# Altium PCB Shield_MCXC444 - PCB.PcbDoc (part 1 of 3)
Units mm, origin at the board's own origin, x right, y up, seen from the top; angles counter-clockwise.
Board outline 100 x 55 mm, 2 copper layers (Top Layer, Bottom Layer); 120 components, 83 nets, 361 pads, 693 vias.
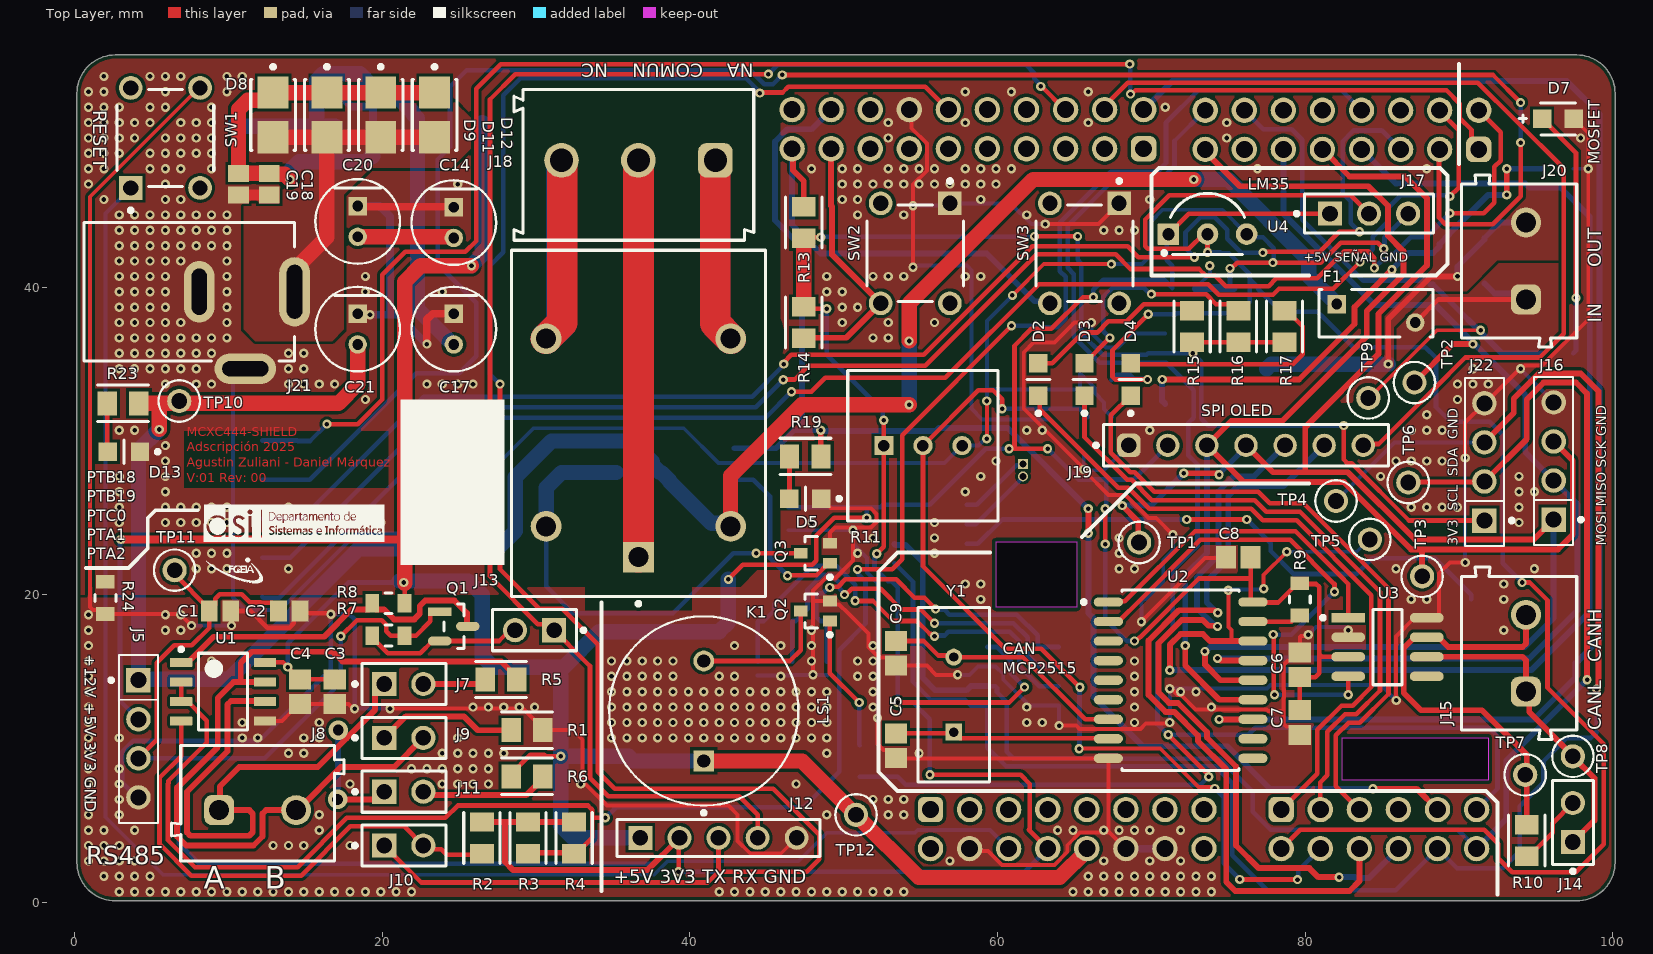
[diagram p0: Top Layer view]
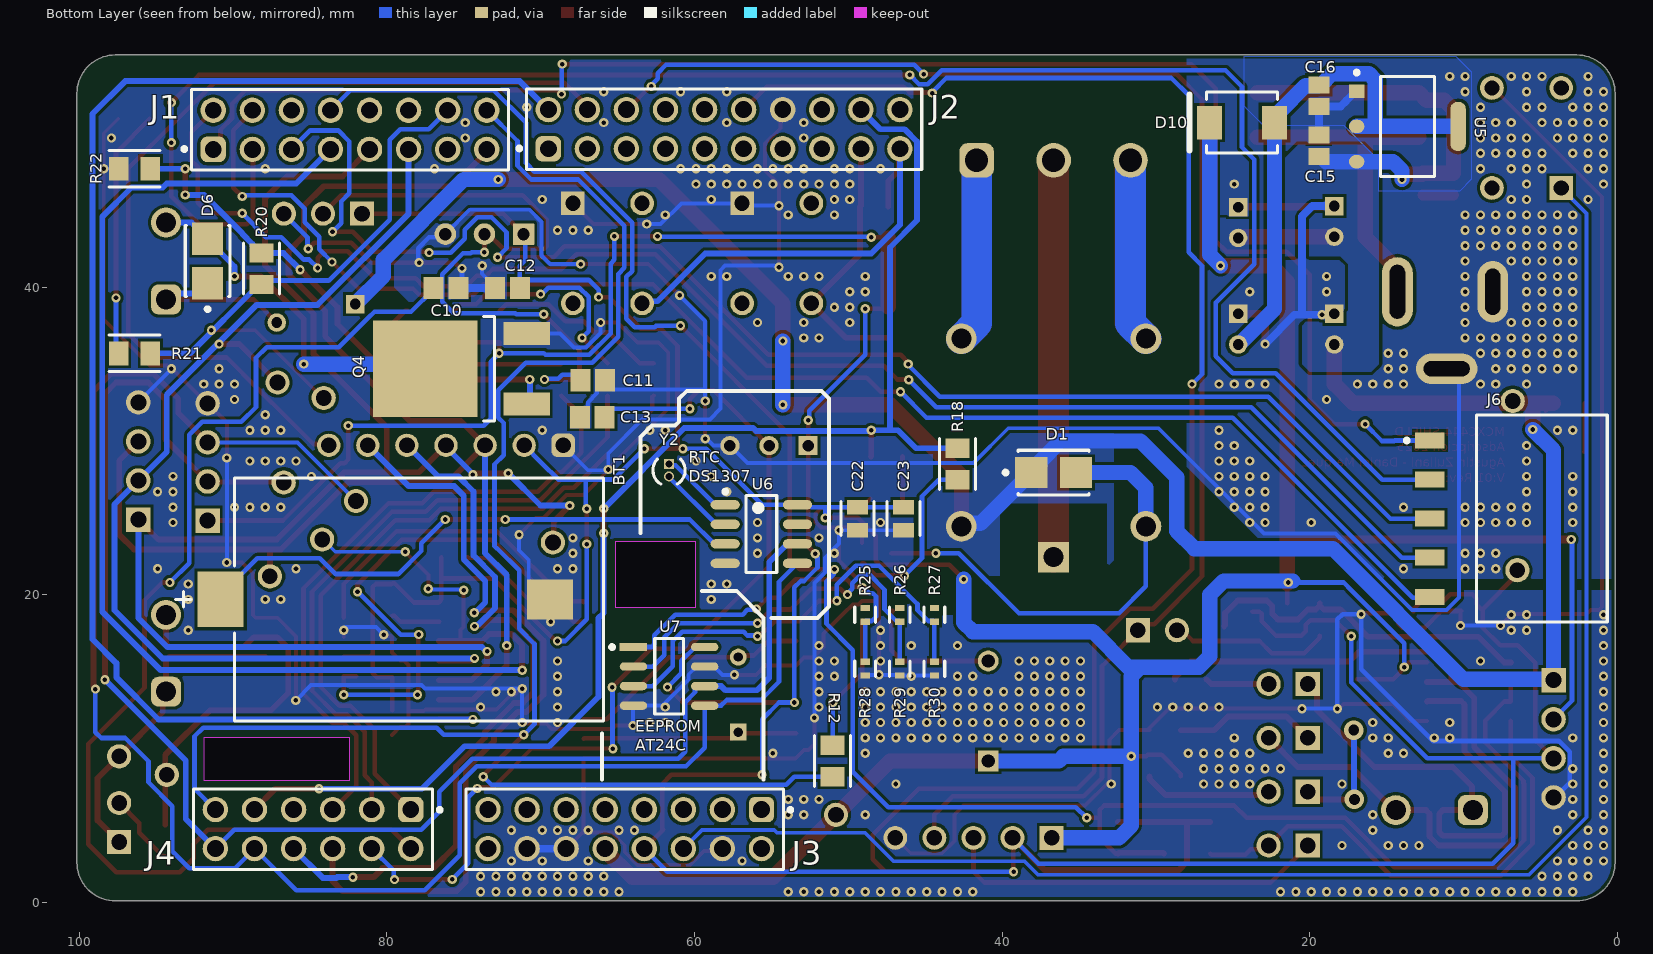
[diagram p1: Bottom Layer view, seen from below]
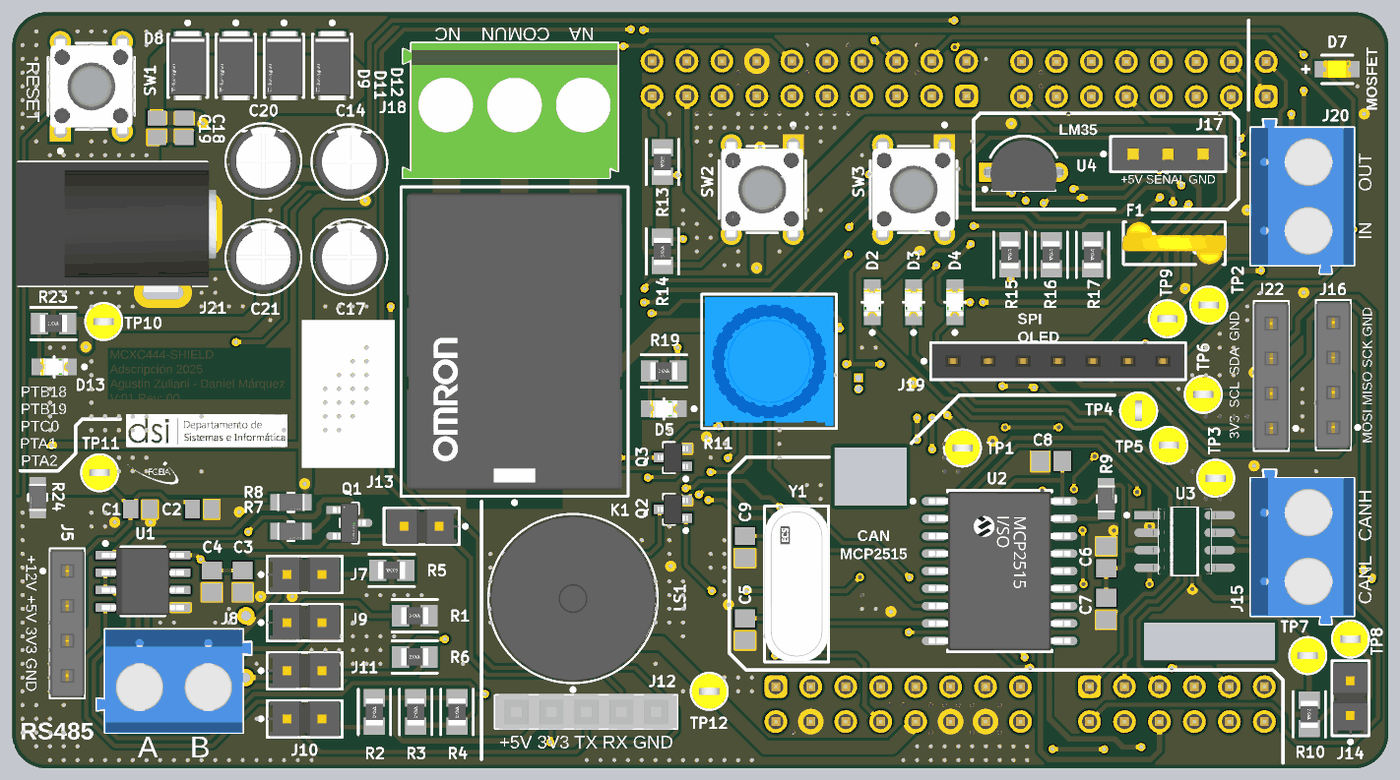
[diagram p3: 3D render of the assembled board from above, using the file's embedded part models]
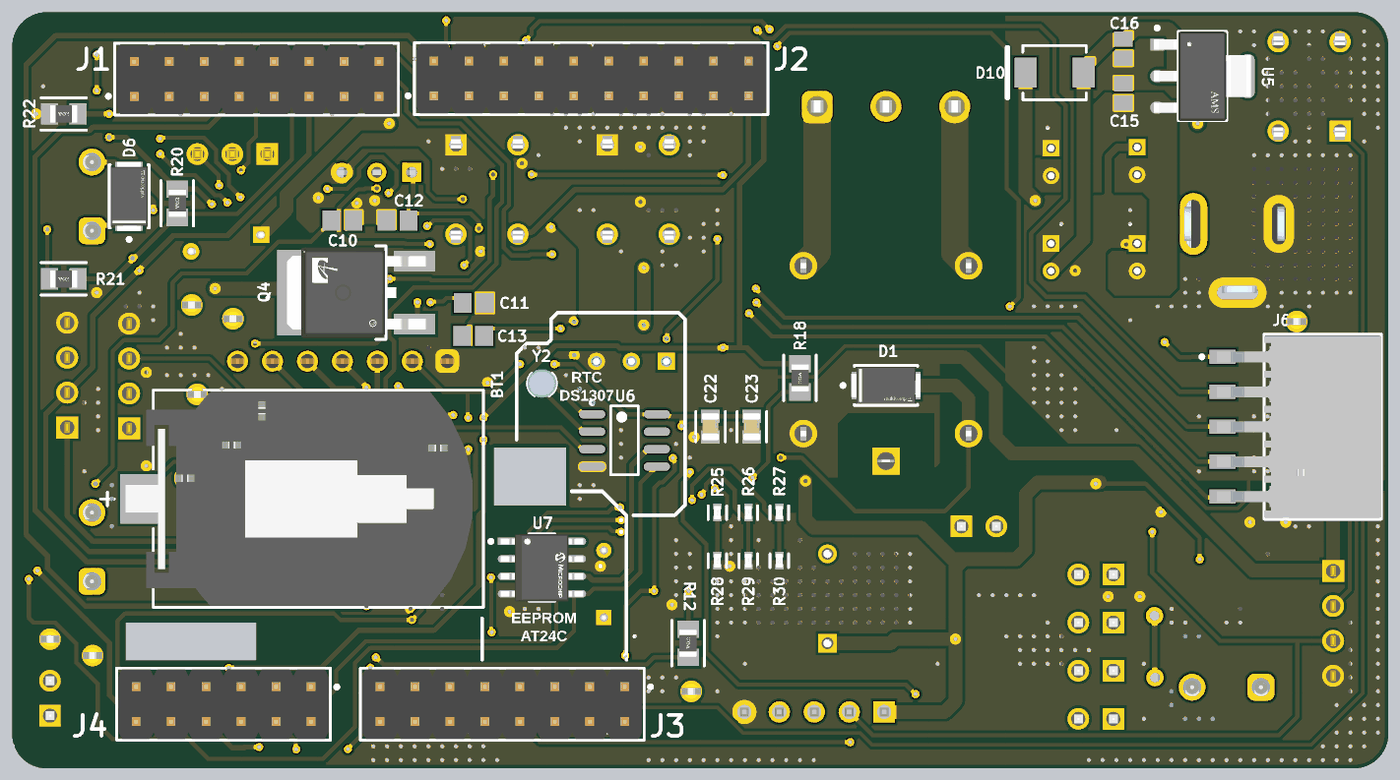
[diagram p4: 3D render of the assembled board from below, using the file's embedded part models]

## Layer stack, top to bottom
Top Solder: solder mask 0.0102, Solder Resist, Dk 3.5
Top Layer: signal copper 0.0356
Dielectric 1: dielectric 0.32, FR-4, Dk 4.8
Bottom Layer: signal copper 0.0356
Bottom Solder: solder mask 0.0102, Solder Resist, Dk 3.5

## Board outline
0.146,2.601 0.146,52.601 cw(c2.646,52.601) 2.646,55.101 97.646,55.101 cw(c97.646,52.601) 100.146,52.601 100.146,2.601 cw(c97.646,2.601) 97.646,0.101 2.646,0.101 cw(c2.646,2.601)
cut-out: 91.9,10.7 91.9,7.95 82.4,7.95 82.4,10.7
cut-out: 59.9,23.45 65.15,23.45 65.15,23.2 65.15,19.2 59.9,19.2

## Design rules (kind name [scope] priority, off if disabled: settings)
BoardOutlineClearance [All] p1: gap=0.254 ignorepadtopadclearanceinfootprint=FALSE
Clearance "Schematic Clearance Constraint_2" [InNet('NA')] p1: gap=2.5 ignorepadtopadclearanceinfootprint=FALSE
Clearance "Schematic Clearance Constraint_1" [InNet('NC')] p2: gap=2.5 ignorepadtopadclearanceinfootprint=FALSE
Clearance "Schematic Clearance Constraint" [InNet('COMUN')] p3: gap=2.5 ignorepadtopadclearanceinfootprint=FALSE
Clearance [All] p4: gap=0.2 ignorepadtopadclearanceinfootprint=FALSE except(0.1: Arc-THPad Track-THPad THPad-THPad)
DiffPairsRouting [All] p1: maxlimit=0.254 minlimit=0.254 mostfreqgap=0.254 toplayer_minwidth=0.381 toplayer_maxwidth=0.381 toplayer_prefwidth=0.381 bottomlayer_minwidth=0.381 bottomlayer_maxwidth=0.381 bottomlayer_prefwidth=0.381 maxuncoupledlength=12.7
HoleSize [All] p1: absolutevalues=TRUE maxlimit=4 minlimit=0.025 maxpercent=80.000 minpercent=20.000
MinimumSolderMaskSliver [All] p1: minsoldermaskwidth=0
PolygonConnect [All] p1: connectstyle=Direct reliefconductorwidth=0.254 reliefentries=4 polygonreliefangle="90 Angle" airgapwidth=0.254
RoomDefinition RTC [InComponentClass('RTC')] p1: confinementstyle=ConfineIn formatcopy=TRUE lockcomponents=FALSE outline 43.3,11.3 94.1,11.3 94.1,34.5 43.3,34.5
RoomDefinition RS485 [InComponentClass('RS485')] p2: confinementstyle=ConfineIn formatcopy=TRUE lockcomponents=FALSE outline 5.6,1.6 49,1.6 49,20.6 5.6,20.6
RoomDefinition Perifericos [InComponentClass('Perifericos')] p3: confinementstyle=ConfineIn formatcopy=TRUE lockcomponents=FALSE outline 27.9,5.3 88.8,5.3 88.8,53.4 27.9,53.4
RoomDefinition CANBUS [InComponentClass('CANBUS')] p4: confinementstyle=ConfineIn formatcopy=TRUE lockcomponents=FALSE outline 52.1,1.5 99.2,1.5 99.2,34.6 52.1,34.6
RoomDefinition "Alimentacion Potencia" [InComponentClass('Alimentacion Potencia')] p5: confinementstyle=ConfineIn formatcopy=TRUE lockcomponents=FALSE outline 0.1,3.9 52.6,3.9 52.6,54.9 0.1,54.9
RoomDefinition Potencia [InComponentClass('Potencia')] p6: confinementstyle=ConfineIn formatcopy=TRUE lockcomponents=FALSE outline 68.9,30.7 99,30.7 99,52.4 68.9,52.4
RoomDefinition main [InComponentClass('main')] p7: confinementstyle=ConfineIn formatcopy=TRUE lockcomponents=FALSE outline 0.1,1.6 93.7,1.6 93.7,54.2 0.1,54.2
RoutingVias [All] p1: holewidth=0.3 width=0.6 viastyle="Through Hole" minholewidth=0.3 minwidth=0.6 maxholewidth=0.7 maxwidth=1.27
SilkToSilkClearance [All] p1 off: silktosilkclearance=0.254
SilkToSolderMaskClearance [IsPad] p1 off: minsilkscreentomaskgap=0.254 clearancetoexposedcopper=TRUE
SolderMaskExpansion [All] p1: expansion=0.102 istentingtop=FALSE
UnRoutedNet UnRoutedNet_GND [not InNetClass('GND')] p1 off: checkbadconnections=TRUE
UnRoutedNet [All] p2: checkbadconnections=TRUE
Width [All] p1: maxlimit=2 minlimit=0.254 preferedwidth=0.3 minimp=50.000000 maximp=50.000000 favimp=50.000000
24 further rules are at their usual default settings.

## Classes and differential pairs
component class RTC: BT1 C22 C23 J22 R25 R26 R27 R28 R29 R30 U6 U7 Y2
component class RS485: C1 C2 C3 C4 J7 J8 J9 J10 J11 J12 J13 Q1 R1 R2 R3 R4 R5 R6 R7 R8 U1
component class Potencia: D6 D7 F1 J20 mmR21 Q4 R20 R21 R22 TP9
component class Perifericos: C10 C11 C12 C13 D1 D2 D3 D4 D5 J17 J18 J19 K1 LS1 Q2 Q3 R11 R12 R13 R14 R15 R16 R17 R18 R19 SW2 SW3 U4
component class CANBUS: C5 C6 C7 C8 C9 J14 J15 J16 mm R9 R10 TP7 TP8 U2 U3 Y1
component class "Alimentacion Potencia": C14 C15 C16 C17 C18 C19 C20 C21 D8 D9 D10 D11 D12 D13 J21 ms R23 R24 TP10 TP11 TP12 U5
component class main: J1 J2 J3 J4 J5 J6 SW1 TP1 TP2 TP3 TP4 TP5 TP6
differential pair RS485: +RS485_P -RS485_N
differential pair CAN: +CAN_P -CAN_N

## Components (designator, comment, footprint, x,y, rotation, side; value= is the part's Value field where it differs from the comment)
BT1 "S8421-45R" FP-S8421-45R-MFG 77.9,19.7 r270 bottom
C1 "100nF" CAPC2013X145X50LL20T25 9.45,18.95 r0 top
C2 "100nF" CAPC2013X145X50LL20T25 13.95,18.95 r0 top
C3 "0.1uf" CAPC2013X145X50NL20T25 16.9,13.7 r90 top
C4 "0.1uf" CAPC2013X145X50NL20T25 14.65,13.7 r90 top
C5 "22pf" CAPC2013X145X50NL20T25 53.4,10.2 r90 top
C6 "10uf" CAPC2013X145X50NL20T25 79.65,15.45 r270 top
C7 "0.1uf" CAPC2013X145X50NL20T25 79.65,11.7 r90 top
C8 "0.1uf" CAPC2013X145X50NL20T25 75.65,22.45 r0 top
C9 "22pf" CAPC2013X145X50NL20T25 53.4,16.2 r90 top
C10 "0.1uf" CAPC2013X145X50NL20T25 76.15,39.95 r0 bottom
C11 "0.1uf" CAPC2013X145X50NL20T25 66.6,33.95 r0 bottom
C12 "0.1uf" CAPC2013X145X50NL20T25 72.15,39.95 r180 bottom
C13 "0.1uf" CAPC2013X145X50NL20T25 66.65,31.55 r180 bottom
C14 "10uF" FP-RAD-TH-D_5_0_5-L_11_1-MFG 24.65,44.2 r270 top
C15 "100nF" CAPC2013X145X50LL20T25 19.4,49.2 r90 bottom
C16 "100nF" CAPC2013X145X50LL20T25 19.4,52.45 r270 bottom
C17 "10uF" FP-RAD-TH-D_5_0_5-L_11_1-MFG 24.65,37.275 r270 top
C18 "100nF" CAPC2013X145X50LL20T25 12.65,46.7 r270 top
C19 "100nF" CAPC2013X145X50LL20T25 10.65,46.7 r270 top
C20 "100uF" FP-RAD-TH-D_5_0_5-L_11_1-MFG 18.4,44.275 r270 top
C21 "10uF" FP-RAD-TH-D_5_0_5-L_11_1-MFG 18.4,37.275 r270 top
C22 "100pF" FP-C0805C-DN-MFG 49.4,24.95 r270 bottom value="100 pF"
C23 "100pF" FP-C0805C-DN-MFG 46.4,24.95 r270 bottom value="100 pF"
D1 "1N4007 SMD" FP-1N4007_SMD-IPC_C 36.65,27.95 r180 bottom
D2 "LED1" FP-SML-LX0805UWC-TR-MFG 62.65,34 r90 top
D3 "LED2" FP-SML-LX0805UWC-TR-MFG 65.65,34 r90 top
D4 "LED3" FP-SML-LX0805UWC-TR-MFG 68.65,34 r90 top
D5 "LED1" FP-SML-LX0805UWC-TR-MFG 47.5,26.25 r180 top
D6 "1N4007 SMD" FP-1N4007_SMD-IPC_C 91.65,41.7 r90 bottom
D7 "SM0805YCL" FP-SM0805YCL-MFG 96.429,50.95 r0 top
D8 "1N4007 SMD" FP-1N4007_SMD-IPC_C 12.9,51.2 r270 top
D9 "1N4007 SMD" FP-1N4007_SMD-IPC_C 16.4,51.2 r270 top
D10 "STPS160U" STM-SMB_P_V 24.4,50.7 r0 bottom
D11 "1N4007 SMD" FP-1N4007_SMD-IPC_C 19.9,51.2 r270 top
D12 "1N4007 SMD" FP-1N4007_SMD-IPC_C 23.4,51.2 r270 top
D13 "12V-LED" FP-SML-LX0805UWC-TR-MFG 3.2,29.3 r180 top
F1 "MF-R010" FP-MF-R010-MFG 84.6,38.3 r0 top value=2.5-7.5Ω
J1 "61301621121" 61301621121 82.39,50.23 r180 bottom locked
J2 "61302021121" 61302021121 58.07,50.27 r180 bottom locked
J3 "61301621121" 61301621121 64.53,4.77 r0 bottom locked
J4 "61301221121" 61301221121 84.79,4.77 r0 bottom locked
J5 "POWER-PINs" FP-ESW-104-23-G-S-MFG 4.15,10.64 r270 top
J6 "GPIO-PINs" SMTC-SMH-105-02-X-S 6.85,24.95 r270 bottom
J7 "TSW-102-07-F-S" FP-TSW-102-07-F-S-MFG 21.4,14.2 r0 top
J8 "CONN EXT" 691102710002 11.9,6.45 r0 top
J9 "TSW-102-07-F-S" FP-TSW-102-07-F-S-MFG 21.4,10.7 r0 top
J10 "TSW-102-07-F-S" FP-TSW-102-07-F-S-MFG 21.4,3.7 r0 top
J11 "TSW-102-07-F-S" FP-TSW-102-07-F-S-MFG 21.4,7.2 r0 top
J12 "UART-PINs" SMTC-ESQ-105-12-X-S 36.78,4.2 r0 top
J13 "TSW-102-07-F-S" FP-TSW-102-07-F-S-MFG 29.9,17.7 r180 top
J14 "TSW-102-07-F-S" FP-TSW-102-07-F-S-MFG 97.4,5.2 r90 top
J15 "CAN BUS OUTPUT" 691102710002 93.9,16.2 r90 top
J16 "SPI-PINs" FP-ESW-104-23-G-S-MFG 96.15,28.7 r90 top
J17 "SSQ-103-01-T-S" FP-SSQ-103-01-T-S-MFG 84.15,44.78 r0 top
J18 "691216710003" 691216710003 36.65,47.95 r180 top
J19 "OLED SPI" 61300711821 76.15,29.715 r0 top
J20 "MOSFET OUT" 691102710002 93.9,41.7 r90 top
J21 "KLDX-0202-B" KYCN-KLDX-0202-B_V 0.6,39.7 r0 top
J22 "I2C-PINs" FP-ESW-104-23-G-S-MFG 91.65,28.64 r90 top
K1 "G5LE-1-E DC5" FP-G5LE-1-E_DC5-MFG 36.65,31.15 r90 top
LS1 "AT-1224-TWT-5V-2-R" FP-AT-1224-TWT-5V-2-R-MFG 40.9,12.45 r90 top
Q1 "BSS138" FP-318-08-IPC_B 24.65,17.95 r0 top
Q2 "BC817-40W" DIOD-SOT323-3_V 48.15,18.95 r180 top
Q3 "BC817-40W" DIOD-SOT323-3_V 48.15,22.7 r180 top
Q4 "AOD4184A" FP-TO252-MFG 76.1,34.7 r90 bottom
R1 "20 K" FP-RN73R2A-IPC_A 29.4,11.2 r0 top
R2 "10 K" FP-RN73R2A-IPC_A 26.472,4.2 r90 top
R3 "10 K" FP-RN73R2A-IPC_A 29.472,4.2 r90 top
R4 "10 K" FP-RN73R2A-IPC_A 32.472,4.2 r90 top
R5 "120R" FP-RN73R2A-IPC_A 27.725,14.5 r180 top
R6 "20 K" FP-RN73R2A-IPC_A 29.4,8.2 r0 top
R7 "10 K" FP-AC0805-MFG 20.4,17.35 r0 top value=2.2KΩ
R8 "10 K" FP-AC0805-MFG 20.4,19.45 r0 top value=2.2KΩ
R9 "10 K" FP-AC0805-MFG 79.65,19.7 r90 top value=2.2KΩ
R10 "120R" FP-RN73R2A-IPC_A 94.4,4.028 r270 top
R11 "COM-09806" FP-COM-09806-MFG 55.15,29.7 r0 top
R12 "20 K" FP-RN73R2A-IPC_A 51.028,9.2 r270 bottom
R13 "10 K" FP-RN73R2A-IPC_A 47.4,44.2 r270 top
R14 "10 K" FP-RN73R2A-IPC_A 47.4,37.7 r90 top
R15 "20 K" FP-RN73R2A-IPC_A 72.65,37.45 r270 top
R16 "20 K" FP-RN73R2A-IPC_A 75.65,37.45 r270 top
R17 "20 K" FP-RN73R2A-IPC_A 78.65,37.45 r270 top
R18 "20 K" FP-RN73R2A-IPC_A 42.9,28.5 r90 bottom
R19 "20 K" FP-RN73R2A-IPC_A 47.5,29 r0 top
R20 "15" FP-RN73R2A-IPC_A 88.15,41.2 r270 bottom
R21 "10 K" FP-RN73R2A-IPC_A 96.4,35.7 r0 bottom
R22 "10 K" FP-RN73R2A-IPC_A 96.4,47.7 r0 bottom
R23 "10 K" FP-RN73R2A-IPC_A 3.15,32.45 r0 top
R24 "0 ohm" FP-AC0805-MFG 2,19.8 r270 top value=2.2KΩ
R25 "" FP-TLRZ1E-MFG 48.9,18.7 r90 bottom
R26 "" FP-TLRZ1E-MFG 46.65,18.7 r90 bottom
R27 "" FP-TLRZ1E-MFG 44.4,18.7 r90 bottom
R28 "" FP-TLRZ1E-MFG 48.9,15.2 r90 bottom
R29 "" FP-TLRZ1E-MFG 46.65,15.2 r90 bottom
R30 "" FP-TLRZ1E-MFG 44.4,15.2 r90 bottom
SW1 "1-1825910-4" FP-1-1825910-4-MFG 5.9,49.7 r180 top
SW2 "1-1825910-4" FP-1-1825910-4-MFG 54.65,42.2 r0 top
SW3 "1-1825910-4" FP-1-1825910-4-MFG 65.65,42.2 r0 top
TP1 "TP MOSI" FP-5004-MFG 69.2,23.4 r0 top
TP2 "TP MISO" FP-5004-MFG 87.1,33.8 r0 top
TP3 "TP SCK" FP-5004-MFG 87.6,21.2 r0 top
TP4 "TP SDA" FP-5004-MFG 82,26.1 r90 top
TP5 "TP CS CAN" FP-5004-MFG 84.2,23.6 r0 top
TP6 "TP SCL" FP-5004-MFG 86.7,27.3 r0 top
TP7 "TP CAN_P" FP-5004-MFG 94.3,8.3 r0 top
TP8 "TP CAN_N" FP-5004-MFG 97.4,9.5 r0 top
TP9 "TP MOSFET" FP-5004-MFG 84.1,32.8 r0 top
TP10 "TP 12V" FP-5004-MFG 6.8,32.6 r0 top
TP11 "TP 3V3" FP-5004-MFG 6.5,21.6 r0 top
TP12 "TP 5V" FP-5004-MFG 50.8,5.7 r0 top
U1 "DS485M" D0008A_N 9.65,13.7 r0 top
U2 "MCP2515-I/SO" FP-C04-051-MFG 71.9,14.45 r0 top
U3 "TJA1050T/CM,118" FP-SOT96-1-IPC_A 85.349,16.605 r0 top
U4 "LM35DZ/NOPB" LP0003A 73.65,43.45 r90 top
U5 "AMS1117-3.3" FP-AMS1117-IPC_C 13.65,50.45 r180 bottom
U6 "DS1307Z+T&R" S8+2_L 55.65,23.95 r180 bottom
U7 "AT24C32D-SSHM-T" FP-C04-057-SN-IPC_C 61.65,14.7 r180 bottom
Y1 "8MHZ" FP-ECS-80-20-4X-MFG 57.15,13.51 r90 top
Y2 "AB26T-32.768KHZ" ABRA-AB26T 61.65,28.1 r270 bottom

## Footprints (in the part's own frame and the unit in brackets; to place one, negate y for a bottom-side part, rotate by r counter-clockwise, add the part's x,y. Pads: shape width x height; smd on the part's side, far side on the other; paste and mask are expansions set on the pad)
61300711821 [mm] "Socket Header, Pitch 2.54 mm, THT, Vertical, single row, 7p"
  rrect50% 1.52x1.52 hole 1.02: 1(-7.62,0)
  round 1.52 hole 1.02: 2(-5.08,0) 3(-2.54,0) 4(0,0) 5(2.54,0) 6(5.08,0) 7(7.62,0)
  silkscreen extent -9.87,-1.35 9.27,1.35, body extent -9.14,-1.25 9.14,1.25, height 8.55
61301221121 [mm] "Pin Header, pitch 2.54 mm, THT, Vertical, dual row, 12p"
  rrect50% 1.65x1.65 hole 1.1: 1(-6.35,-1.27)
  round 1.65 hole 1.1: 2(-6.35,1.27) 3(-3.81,-1.27) 4(-3.81,1.27) 5(-1.27,-1.27) 6(-1.27,1.27) 7(1.27,-1.27) 8(1.27,1.27) 9(3.81,-1.27) 10(3.81,1.27) 11(6.35,-1.27) 12(6.35,1.27)
  silkscreen extent -8.35,-2.62 7.77,2.62, body extent -7.62,-2.54 7.62,2.54, height 8.59
61301621121 [mm] "Pin Header, pitch 2.54 mm, THT, Vertical, dual row, 16p"
  rrect50% 1.65x1.65 hole 1.1: 1(-8.89,-1.27)
  round 1.65 hole 1.1: 2(-8.89,1.27) 3(-6.35,-1.27) 4(-6.35,1.27) 5(-3.81,-1.27) 6(-3.81,1.27) 7(-1.27,-1.27) 8(-1.27,1.27) 9(1.27,-1.27) 10(1.27,1.27) 11(3.81,-1.27) 12(3.81,1.27) 13(6.35,-1.27) 14(6.35,1.27) 15(8.89,-1.27) 16(8.89,1.27)
  silkscreen extent -10.89,-2.62 10.31,2.62, body extent -10.16,-2.54 10.16,2.54, height 8.59
61302021121 [mm] "Pin Header, pitch 2.54 mm, THT, Vertical, dual row, 20p"
  rrect50% 1.65x1.65 hole 1.1: 1(-11.43,-1.27)
  round 1.65 hole 1.1: 2(-11.43,1.27) 3(-8.89,-1.27) 4(-8.89,1.27) 5(-6.35,-1.27) 6(-6.35,1.27) 7(-3.81,-1.27) 8(-3.81,1.27) 9(-1.27,-1.27) 10(-1.27,1.27) 11(1.27,-1.27) 12(1.27,1.27) 13(3.81,-1.27) 14(3.81,1.27) 15(6.35,-1.27) 16(6.35,1.27) 17(8.89,-1.27) 18(8.89,1.27) 19(11.43,-1.27) 20(11.43,1.27)
  silkscreen extent -13.43,-2.62 12.85,2.62, body extent -12.7,-2.54 12.7,2.54, height 8.59
691102710002 [mm] "5,00mm - modular - blue - Horizontal entry with pressure clamp - 9,9 mm height - 02p"
  rrect50% 1.95x1.95 hole 1.3: 1(-2.5,-0.45)
  round 1.95 hole 1.3: 2(2.5,-0.45)
  silkscreen extent -5.6,-3.75 5.6,3.75, body extent -5.6,-3.75 5.6,3.75, height 9.96
691216710003 [mm] "Serie 2167 - 5.00 mm _ 3 pins"
  rrect50% 2.25x2.25 hole 1.5: 1(-5,-0.3)
  round 2.25 hole 1.5: 2(0,-0.3) 3(5,-0.3)
  silkscreen extent -7.5,-4.9 8.1,4.9, body extent -7.5,-4.9 8.1,4.9, height 13.85
ABRA-AB26T [mm] "THD, 2-Leads, Dia 2.1mm, Body Length 6.2mm"
  rect 0.65x0.65 hole 0.45: 1(-0.4,0)
  round 0.65 hole 0.45: 2(0.4,0)
  silkscreen extent -0.74,-1.05 0.91,1.05, body extent -1.05,-1.05 1.05,1.06, height 6.2
CAPC2013X145X50LL20T25 [mm] "Chip Capacitor, 2-Leads, Body 2.00x1.25mm, IPC High Density"
  rect 1.1x1.35 smd: 1(-0.7,0) 2(0.7,0)
  body extent -1.1,-0.72 1.1,0.72, height 1.45
CAPC2013X145X50NL20T25 [mm] "Chip Capacitor, 2-Leads, Body 2.00x1.25mm, IPC Medium Density"
  rect 1.3x1.45 smd: 1(-0.8,0) 2(0.8,0)
  body extent -1.1,-0.72 1.1,0.72, height 1.45
D0008A_N [mm] "SOIC, 8-Leads, Body 5x4mm, Pitch 1.27mm, IPC Medium Density"
  rrect17% 1.45x0.6 smd: 1(-2.725,1.905) 2(-2.725,0.635) 3(-2.725,-0.635) 4(-2.725,-1.905) 5(2.725,-1.905) 6(2.725,-0.635) 7(2.725,0.635) 8(2.725,1.905)
  silkscreen extent -2.85,-2.5 1.6,2.88, body extent -3,-2.45 3,2.45, height 1.63
DIOD-SOT323-3_V [mm] "SOT323, 3-Leads, Body 2.2x1.35mm, Pitch 0.65mm"
  rect 0.9x0.7 smd: 1(-0.95,0.65) 2(-0.95,-0.65) 3(0.95,0)
  silkscreen extent -1.08,-1.1 0.67,1.67, body extent -1.1,-1.1 1.1,1.1, height 1.07
FP-1-1825910-4-MFG [mm]
  rect 1.54x1.54 hole 0.99 paste-1000 mask+0: 1(2.25,3.25)
  round 1.54 hole 0.99 paste-1000 mask+0: 2(2.25,-3.25) 3(-2.25,3.25) 4(-2.25,-3.25)
  silkscreen extent -3.15,-3.15 3.15,4.82, body extent -3.24,-4.12 3.24,4.12, height 0.25
FP-1N4007_SMD-IPC_C [mm]
  rect 2.1x2 smd paste+0 mask+0: 1(-1.45,0) 2(1.45,0)
  silkscreen extent -3.25,-1.45 2.3,1.45, body extent -2.52,-1.35 2.52,1.35, height 2.62
FP-318-08-IPC_B [mm]
  rect 1.524x0.578 smd paste+0 mask+0: 1(-0.91,0.95)
  rrect100% 1.524x0.578 smd paste+0 mask+0: 2(-0.91,-0.95) 3(0.91,0)
  silkscreen extent -0.65,-1.45 0.65,1.45, body extent -1.92,-1.7 1.92,1.7, height 0.25
FP-5004-MFG [mm]
  round 1.57 hole 1.02 paste-1000 mask+0: 1(0,0)
  silkscreen extent -1.35,-1.34 1.35,1.34, body extent -1.45,-1.45 1.45,1.45, height 0.25
FP-AC0805-MFG [mm]
  rect 0.9x1.2 smd paste+0 mask+0: 1(-1.05,0) 2(1.05,0)
  silkscreen extent -0.23,-0.67 0.23,0.67, body extent -1.6,-0.77 1.6,0.77, height 0.25
FP-AMS1117-IPC_C [mm]
  rect 1.004x0.872 smd paste+0 mask+0: 1(-3.295,2.29)
  rrect100% 1.004x0.872 smd paste+0 mask+0: 2(-3.295,0) 3(-3.295,-2.29)
  rrect87% 1.004x3.182 smd paste+0 mask+0: 4(3.295,0)
  silkscreen extent -3.42,-3.25 1.75,3.62, body extent -3.53,-3.25 3.53,3.25, height 1.8
FP-AT-1224-TWT-5V-2-R-MFG [mm]
  rect 1.35x1.35 hole 0.85 paste-1000 mask+0: 1(-3.25,0)
  round 1.35 hole 0.85 paste-1000 mask+0: 2(3.25,0)
  silkscreen extent -6.75,-6.15 6.15,6.15, body extent -6.25,-6.25 6.25,6.25, height 0.25
FP-C04-051-MFG [mm]
  rrect100% 1.9x0.6 smd paste+0 mask+0: 1(-4.7,5.08) 2(-4.7,3.81) 3(-4.7,2.54) 4(-4.7,1.27) 5(-4.7,0) 6(-4.7,-1.27) 7(-4.7,-2.54) 8(-4.7,-3.81) 9(-4.7,-5.08) 10(4.7,-5.08) 11(4.7,-3.81) 12(4.7,-2.54) 13(4.7,-1.27) 14(4.7,0) 15(4.7,1.27) 16(4.7,2.54) 17(4.7,3.81) 18(4.7,5.08)
  silkscreen extent -6.42,-5.87 3.8,5.87, body extent -5.75,-6.12 5.75,6.12, height 0.25
FP-C04-057-SN-IPC_C [mm]
  rect 1.777x0.542 smd paste+0 mask+0: 1(-2.318,1.905)
  rrect100% 1.777x0.542 smd paste+0 mask+0: 2(-2.318,0.635) 3(-2.318,-0.635) 4(-2.318,-1.905) 5(2.318,-1.905) 6(2.318,-0.635) 7(2.318,0.635) 8(2.318,1.905)
  silkscreen extent -3.83,-2.45 0.93,2.45, body extent -3,-2.45 3,2.45, height 1.75
FP-C0805C-DN-MFG [mm]
  rect 0.95x1.35 smd paste+0 mask+0: 1(-0.75,0) 2(0.75,0)
  silkscreen extent -1.1,-1.07 1.1,1.07, body extent -1,-0.62 1,0.63, height 0.88
FP-COM-09806-MFG [mm]
  rect 1.25x1.25 hole 0.75 paste-1000 mask+0: 1(-2.54,0)
  round 1.25 hole 0.75 paste-1000 mask+0: 2(0,0) 3(2.54,0)
  silkscreen extent -4.89,-4.89 4.89,4.89, body extent -4.99,-4.99 4.99,4.99, height 0.25
FP-ECS-80-20-4X-MFG [mm]
  rect 1.1x1.1 hole 0.6 paste-1000 mask+0: 1(-2.44,0)
  round 1.1 hole 0.6 paste-1000 mask+0: 2(2.44,0)
  silkscreen extent -5.68,-2.32 5.68,2.32, body extent -5.77,-2.42 5.77,2.42, height 0.25
FP-ESW-104-23-G-S-MFG [mm]
  rect 1.59x1.59 hole 1.04 paste-1000 mask+0: 1(-3.81,0)
  round 1.59 hole 1.04 paste-1000 mask+0: 2(-1.27,0) 3(1.27,0) 4(3.81,0)
  silkscreen extent -5.46,-1.9 5.46,1.27, body extent -5.56,-1.37 5.56,1.37, height 0.25
FP-G5LE-1-E_DC5-MFG [mm]
  rect 2x2 hole 1.3 paste-1000 mask+0: 1(-8.7,0)
  round 2 hole 1.3 paste-1000 mask+0: 2(-6.7,-6) 3(5.5,-6) 4(5.5,6) 5(-6.7,6)
  silkscreen extent -11.85,-8.25 11.25,8.25, body extent -11.35,-8.35 11.35,8.35, height 0.25
FP-MF-R010-MFG [mm]
  rect 1.2x1.2 hole 0.7 paste-1000 mask+0: 1(-2.55,0.6)
  round 1.2 hole 0.7 paste-1000 mask+0: 2(2.55,-0.6)
  silkscreen extent -3.7,-1.55 3.7,1.55, body extent -3.8,-1.65 3.8,1.65, height 0.25
FP-RAD-TH-D_5_0_5-L_11_1-MFG [mm]
  rect 1.2x1.2 hole 0.7 paste-1000 mask+0: 1(-1,0)
  round 1.2 hole 0.7 paste-1000 mask+0: 2(1,0)
  silkscreen extent -2.75,-2.75 2.75,2.75, body extent -2.85,-2.85 2.85,2.85, height 0.25
FP-RN73R2A-IPC_A [mm]
  rect 1.255x1.556 smd paste+0 mask+0: 1(-1.025,0) 2(1.025,0)
  silkscreen extent -1.65,-1.18 1.65,1.18, body extent -2.15,-1.28 2.15,1.28, height 0.25
FP-S8421-45R-MFG [mm]
  rect 2.6x3 smd paste+0 mask+0: 1(0,8.5)
  rect 3.6x3 smd paste+0 mask+0: 2(0,-12.9)
  silkscreen extent -7.9,-15.83 7.9,12, body extent -7.8,-14 7.8,11.29, height 5.5
FP-SM0805YCL-MFG [mil]
  rect 47x47 smd paste+0 mask+0: 1(-40.5,0) 2(40.5,0)
  silkscreen extent -100,-41 45,40, body extent -40,-24 39,24, height 42
FP-SML-LX0805UWC-TR-MFG [mm]
  rect 1.2x1.2 smd paste+0 mask+0: 1(-1.05,0) 2(1.05,0)
  silkscreen extent -2.32,-0.75 0,0.75, body extent -1.75,-0.85 1.75,0.85, height 0.25
FP-SOT96-1-IPC_A [mm]
  rect 2.204x0.608 smd paste+0 mask+0: 1(-2.551,1.905)
  rrect100% 2.204x0.608 smd paste+0 mask+0: 2(-2.551,0.635) 3(-2.551,-0.635) 4(-2.551,-1.905) 5(2.551,-1.905) 6(2.551,-0.635) 7(2.551,0.635) 8(2.551,1.905)
  silkscreen extent -4.33,-2.45 0.95,2.45, body extent -4.15,-2.95 4.15,2.95, height 0.25
FP-SSQ-103-01-T-S-MFG [mm]
  rect 1.57x1.57 hole 1.02 paste-1000 mask+0: 1(-2.54,0)
  round 1.57 hole 1.02 paste-1000 mask+0: 2(0,0) 3(2.54,0)
  silkscreen extent -4.82,-1.27 4.19,1.27, body extent -4.29,-1.37 4.29,1.37, height 0.25
FP-TLRZ1E-MFG [mm]
  rect 0.4x0.6 smd paste+0 mask+0: 1(-0.45,0) 2(0.45,0)
  silkscreen extent -0.5,-0.67 0.5,0.67, body extent -0.5,-0.25 0.5,0.25, height 0.45
FP-TO252-MFG [mm]
  rect 1.5x3 smd paste+0 mask+0: 1(-2.286,-5.202) 3(2.286,-5.202)
  rect 6.25x6.8 smd paste+0 mask+0: 4(0,1.398)
  silkscreen extent -3.4,-3.11 3.4,-2.38, body extent -3.3,-6.01 3.3,4.06, height 2.6
FP-TSW-102-07-F-S-MFG [mm]
  rect 1.57x1.57 hole 1.02 paste-1000 mask+0: 1(-1.27,0)
  round 1.57 hole 1.02 paste-1000 mask+0: 2(1.27,0)
  silkscreen extent -3.3,-1.34 2.73,1.34, body extent -2.83,-1.44 2.83,1.44, height 0.25
KYCN-KLDX-0202-B_V [mm] "3 Conductor Jack, 9 x 14.5 mm Body"
  oval 2x4.5 hole 1 slot 3.5 at 90 deg: 1(13.7,0)
  oval 2x4 hole 1 slot 3 at 90 deg: 2(7.5,0)
  oval 4x2 hole 1 slot 3 at 0 deg: 3(10.5,-5)
  silkscreen extent 0,-4.5 13.7,4.5, body extent -0.15,-5 14.35,4.5, height 11
LP0003A [mm] "TO, Flat Index; 3 In-Line, Formed Axial Leads; Body Dia. 4.8mm; Leads 0.56 x 0.41 mm (max)"
  rrect7% 1.4x1.4 hole 0.8: 1(0,2.54)
  round 1.4 hole 0.8: 2(0,0) 3(0,-2.54)
  silkscreen extent -1.35,-2.41 2.65,2.95, body extent -1.33,-2.83 2.35,2.83, height 9.01
S8+2_L [mm] "SOIC, 8-Leads, Body 4.9x3.9mm, Pitch 1.27mm, IPC High Density"
  oval 1.9x0.6 smd: 1(-2.35,1.905) 2(-2.35,0.635) 3(-2.35,-0.635) 4(-2.35,-1.905) 5(2.35,-1.905) 6(2.35,-0.635) 7(2.35,0.635) 8(2.35,1.905)
  silkscreen extent -2.48,-2.5 1,2.88, body extent -2,-2.5 2,2.5, height 1.75
SMTC-ESQ-105-12-X-S [mm] "Elevated Socket, 1x5 Pins, Vertical, 2.54mm Pitch, Female"
  rect 1.55x1.55 hole 1.02: 1(0,0)
  round 1.55 hole 1.02: 2(2.54,0) 3(5.08,0) 4(7.62,0) 5(10.16,0)
  silkscreen extent -1.53,-1.2 11.69,1.2, body extent -1.52,-1.27 11.68,1.27, height 11.05
SMTC-SMH-105-02-X-S [mm] "Horizontal SMT Socket Assembly, 1x5 Pins, 2.54mm Pitch, Female"
  rect 1.04x1.91 smd: 1(-5.08,-5.338) 2(-2.54,-5.338) 3(0,-5.338) 4(2.54,-5.338) 5(5.08,-5.338)
  silkscreen extent -6.73,-6.97 6.73,6.19, body extent -6.6,-5.75 6.6,6.19, height 2.41
STM-SMB_P_V [mm] "SMB, 2-Leads, Body 4.325x3.625mm"
  rect 1.62x2.18 smd: 1(-2.11,0) 2(2.11,0)
  silkscreen extent -2.3,-1.97 3.42,1.97, body extent -2.16,-1.81 2.16,1.81, height 2.59

## Part data
BT1: library part CMP-2000-07028-3, "BATTERY HOLDER COIN 20MM SMD", Case/Package=SMD/SMT, Max Operating Temperature=105°C, Min Operating Temperature=-40°C, Package Quantity=500, Contact Plating=Bronze, Material=Polyphenylene, Mount="Surface Mount", Number of Batteries=1, Number of Cells=1, Packaging="Tape and Reel", REACH SVHC="No SVHC", Termination=SMD/SMT
C1 C2 C15 C16 C18 C19: library part CMP-2007-01107-1, Manufacturer=Kemet, Part Number=C0805X104K3RACTU
C3 C4 C5 C6 C7 C8 C9 C10 C11 C12 C13: library part CMP-2007-01227-1, Manufacturer=Kemet, Part Number=C0805S104K5RACTU
C14 C17 C21: library part CMP-05427-000260-1, "Aluminum Electrolytic Capacitors (Radial Lead Type) AEC-Q200 Qualified 10uF ±20% 50V", Case/Package=Radial, Leakage Current=3uA, Max Operating Temperature=105°C, Min Operating Temperature=-55°C, Package Quantity=2000, Ripple Current=39mA, Tolerance=20%, Voltage Rating=50V, Capacitance=10uF, Construction=RADIAL, Contact Plating=Tin, Diameter=5mm, Height=11mm, Height - Seated (Max)=0.472inch, Lead Diameter=0.5mm, Lead Free="Lead Free", Lead Pitch=2.5mm, Lead/Base Style=Straight, Length=11mm, Life (Hours)=1000Hour, Mount="Through Hole", Packaging="Ammo Pack", Polarity=Polar, Radiation Hardening=No, RoHS Compliant=Yes, Series=NHG, Termination=Radial, Voltage Rating (DC)=50V
C20: library part CMP-05427-000260-1, "Aluminum Electrolytic Capacitors (Radial Lead Type) AEC-Q200 Qualified 10uF ±20% 50V", Capacitance=10uF, Case/Package=Radial, Leakage Current=3uA, Max Operating Temperature=105°C, Min Operating Temperature=-55°C, Package Quantity=2000, Ripple Current=39mA, Tolerance=20%, Voltage Rating=50V, Construction=RADIAL, Contact Plating=Tin, Diameter=5mm, Height=11mm, Height - Seated (Max)=0.472inch, Lead Diameter=0.5mm, Lead Free="Lead Free", Lead Pitch=2.5mm, Lead/Base Style=Straight, Length=11mm, Life (Hours)=1000Hour, Mount="Through Hole", Packaging="Ammo Pack", Polarity=Polar, Radiation Hardening=No, RoHS Compliant=Yes, Series=NHG, Termination=Radial, Voltage Rating (DC)=50V
C22 C23: library part CMP-2007-00520-2, "C0805 100 pF C0G 30ppm/°C 5.00% 100 V", Capacitance="100 pF", Manufacturer=KEMET, Manufacturer Part Number=C0805C101J1GAC7210, Package=C0805C-DN, Temperature="-55°C to +125°C", Temperature Characteristic=C0G, Temperature Coefficient=30ppm/°C, Temperature Range High=+125°C, Temperature Range Low=-55°C, Tolerance=0.05, Voltage Rating="100 V", Automotive=No, Category=Cap, ComponentLink2Description=Datasheet, ComponentLink2URL=https://content.kemet.com/datasheets/KEM_C1003_C0G_SMD.pdf, Device Class L1="Passive Components", Device Class L2=Capacitors, Device Class L3="Ceramic Capacitors", Height=0.88mm, Ipc Land Pattern Name=CAPC200125X78, Lead Free=Yes, Material=Ceramic, Mouser Description="Multilayer Ceramic Capacitors MLCC - SMD/SMT 100volts 100pF C0G 5%", Octopart=https://octopart.com/c0805c101j1gac7210-kemet-9145156, RoHS=TRUE
D1 D6 D8 D9 D11 D12: library part CMP-12389-000001-1, "Rectifier, 1Kv, 1A, Do-214Ac Rohs Compliant: Yes"
D2 D3 D4 D5 D13: library part CMP-00229-00139794-1, "SML-LX0805UWC-TR White LED, 0805 Diffused, Rectangle Lens SMD package", Case/Package=0805, Forward Current=20mA, Forward Voltage=3.5V, Illumination Color=White, Lens Color="Clear, Yellow", Max Operating Temperature=85°C, Min Operating Temperature=-40°C, Power Rating=120mW, Approvals="CSA, UL", Luminous Intensity=150mcd, Mount="Surface Mount", NexarPartId=139794, Number of LEDs=1, RoHS=Compliant, Viewing Angle=120°
D7: library part CMP-35283-000007-1, "LED YELLOW CLEAR 0805 SMD", Case Code (Imperial)=0805, Case Code (Metric)=2012, Color=Yellow, Forward Current=2mA, Forward Voltage=1.9V, Lens Color=Colorless, Max Operating Temperature=80°C, Min Operating Temperature=-30°C, Package Quantity=4000, Case/Package=0805, Dominant Wavelength=592nm, Height=0.8mm, Illumination Color=Yellow, Lead Free="Lead Free", Length=2mm, Lens Transparency=Clear, Luminous Intensity=11.5mcd, Mount="Surface Mount", Packaging="Tape and Reel", Test Current=2mA, Viewing Angle=130°, Width=1.2mm
D10: library part CMP-2000-07172-1, "Power Schottky Rectifier, 1 A, 60 V, 2-Pin SMD (SMB), RoHS, Tape and Reel", Capacitance @ Vr, F=-, Current - Average Rectified (Io)=1A, Current - Reverse Leakage @ Vr=4µA@60V, Manufacturer=STMicroelectronics, Operating Temperature - Junction=150°C(Max), Package / Case=DO-214AA,SMB, Package Description="2-Pin Surface Mount Device, Body 4.325 x 3.625 mm", Package Reference=SMB_P, Standard Package=1, Supplier Device Package=SMB, Voltage - DC Reverse (Vr) (Max)=60V, Voltage - Forward (Vf) (Max) @ If=670mV@1A, Category=DiscreteSemiconductorProducts, Datasheet URL=http://www.st.com/content/ccc/resource/technical/document/datasheet/93/c1/06/0c/63/7c/41/d5/CD00001023.pdf/files/CD00001023.pdf/jcr:content/translations/en.CD00001023.pdf, Datasheet Version=03/2010, Diode Type=Schottky, Family=Diodes,Rectifiers-Single, Manufacturer URL=http://www.st.com/, Mounting Technology=SurfaceMount, Mounting Type=SurfaceMount, Online Catalog=SchottkyDiode, Other Names=497-7547-6, Other Related Documents=STPS160ViewAllSpecifications, Package URL=http://www.st.com/st-web-ui/static/active/en/resource/technical/document/datasheet/CD00279657.pdf, Packaging=Digi-Reel®, Reverse Recovery Time (trr)=-, Series=-, Speed=FastRecovery=200mA(Io)
F1: library part CMP-07400-000011-1, "PTC RESET FUSE 60V 100MA RADIAL", Ambient Temperature Range High=+85°C, Ambient Temperature Range Low=-40°C, Current Rating=40A, Hold Current=0.1A, Manufacturer="Bourns Inc.", Resistance=2.5-7.5Ω, Temperature="-40°C to +85°C", Trip Current=0.2A, Voltage Rating=60V, Automotive=No, Category=Fuse, ComponentLink2Description=Datasheet, ComponentLink2URL=https://www.bourns.com/docs/Product-Datasheets/mfr.pdf, Device Class L1="Circuit Protection", Device Class L2="PTC Resettable Fuses", Device Class L3=unset, Digikey Description="PTC RESET FUSE 60V 100MA RADIAL", Height=12.7mm, Lead Free=Yes, Manufacturer Part Number=MF-R010, Mouser Description="Resettable Fuses - PPTC 60v Max 40Amps Max Hold .10 Trip .20", Octopart=https://octopart.com/mf-r010-bourns-5791, Package=MF-R010, RoHS=TRUE, Temperature Range High=+85°C, Temperature Range Low=-40°C, Trip Time=4s
J1 J3: library part CMP-1502-01097-3, Color=Black, Contact Resistance=20mΩ, Current Rating=3A, Max Operating Temperature=105°C, Min Operating Temperature=-40°C, Operating Supply Voltage=250V, Connector Type="Male Pin", Contact Material=Copper, Contact Mating Length=5.9944mm, Contact Plating=Gold, Gender=Male, Height=8.89mm, Lead Pitch=2.54mm, Mount="Through Hole", NexarPartId=32855550, Number Of Contacts=16, Number of Pins=16, Number of Positions=16, Number Of Rows=2, Orientation=Vertical, Packaging=Bulk, Pitch=2.54mm, REACH SVHC=Unknown, RoHS=Compliant, Row Spacing=2.54mm, Termination=Solder, Voltage Rating=250V
J2: library part CMP-1502-01104-3, Color=Black, Contact Resistance=20mΩ, Current Rating=3A, Operating Supply Voltage=250V, Connector Type="Male Pin", Contact Material=Copper, Contact Mating Length=5.9944mm, Contact Plating=Gold, Gender=Male, Lead Pitch=2.54mm, Mount="Through Hole", NexarPartId=32855556, Number Of Contacts=20, Number of Pins=20, Number of Positions=20, Number Of Rows=2, Orientation=Vertical, Packaging=Bulk, Pitch=2.54mm, REACH SVHC=Unknown, RoHS=Compliant, Row Spacing=2.54mm, Termination=Solder
J4: library part CMP-1502-01088-4, Color=Black, Contact Resistance=20mΩ, Current Rating=3A, Max Operating Temperature=105°C, Min Operating Temperature=-40°C, Operating Supply Voltage=250V, Connector Type="Male Pin", Contact Material=Copper, Contact Mating Length=5.9944mm, Contact Plating=Gold, Gender=Male, Height=8.89mm, Lead Pitch=2.54mm, Mount="Through Hole", NexarPartId=32855540, Number Of Contacts=12, Number of Pins=12, Number of Positions=12, Number Of Rows=2, Orientation=Vertical, Packaging=Bulk, Pitch=2.54mm, REACH SVHC=Unknown, RoHS=Compliant, Row Spacing=2.54mm, Termination=Solder, Voltage Rating=250V
J5 J16 J22: library part CMP-00575-09268283-1, "Conn Elevated Socket SKT 4 POS 2.54mm Solder ST Thru-Hole", Contact Resistance=10mΩ, Current Rating=5.2A, Housing Color=Black, Manufacturer Lifecycle Status=PRODUCTION, Max Current Rating=6.9A, Max Operating Temperature=125°C, Max Voltage Rating (AC)=550V, Min Operating Temperature=-55°C, Contact Material="Gold, Nickel", Contact Plating=Gold, Depth=2.41mm, Height=13.72mm, Housing Material=Polyester, Length=10.67mm, Lifecycle Status=Production, Number Of Contacts=4, Number Of Rows=1, Orientation=Straight, Pitch=2.54mm, Radiation Hardening=No, RoHS=Compliant, Termination=Solder
J6: library part CMP-1023-00168-1, "SMT Horizontal Socket, -55 to 125 degC, 2.54 mm Pitch, 5-Pin, Female, RoHS", Manufacturer=Samtec, PartNumber=SMH-105-02-G-S, Temperature Range="-55 to 125 degC", ComponentLink1Description="Manufacturer URL", ComponentLink1URL=http://www.samtec.com, ComponentLink2Description=Datasheet, ComponentLink2URL=http://www.samtec.com/documents/webfiles/pdf/SMH.PDF, ComponentLink3Description="Package Specification", ComponentLink3URL=http://www.samtec.com/documents/webfiles/cpdf/SMH-1XX-XX-XX-X-XX-MKT.pdf, DatasheetVersion=F-214, Mounting Technology="Surface Mount", Orientation=Horizontal, PackageDescription=".100 [2.54] Horizontal SMT Socket Assembly", PackageReference=SMH-105-02-X-S, PackageVersion="AF, 2/1999", Pitch="2.54 mm", RoHS=True
J7 J9 J10 J11 J13 J14: library part CMP-02766-001458-1, "CONN HEADER VERT 2POS 2.54MM", Color=Black, Flammability Rating="UL94 V-0", Max Current Rating=7.6A, Max Operating Temperature=125°C, Max Voltage Rating (AC)=550V, Min Operating Temperature=-55°C, Package Quantity=1, Connector Type=Header, Contact Finish - Mating=GOLD, Contact Material=Bronze, Contact Mating Length=0.23inch, Contact Plating=Gold, Contact Shape=Square, Contact Type="Male Pin", Depth=2.54mm, Fastening Type=Pull, Gender=Male, Housing Color=Black, Housing Material=Polyester, Insulation Color=Black, Insulation Material=PBT, Length=5.08mm, Mount="Through Hole", Number Of Contacts=2, Number of Positions=2, Number Of Rows=1, Orientation=Straight, Packaging=Bulk, Pitch=2.54mm, Radiation Hardening=No, REACH SVHC="No SVHC", RoHS Compliant=Yes, Series=TSW, Termination=Solder
J8 J15 J20: library part CMP-1502-03258-2, Color=Blue, Current=15A, Max Operating Temperature=105°C, Min Operating Temperature=-40°C, Voltage=300V, Contact Material=Brass, Contact Plating=Tin, Current Rating=15A, Height=13.4mm, Housing Material=Nylon, Lead Pitch=5mm, Length=7.5mm, Mount="Through Hole", NexarPartId=8917706, Number Of Contacts=2, Number of Levels=1, Number of Pins=2, Number of Positions Per Level=2, Packaging=Box, Pitch=5.0038mm, Plating=Steel, REACH SVHC=Unknown, RoHS=Compliant, Stripping Length=-6mm, Termination=Screw, Voltage Rating=300V, Width=11.2mm, Wire Gauge (Max)=22AWG, Wire Gauge (Min)=14AWG, Wire/Cable Gauge=22AWG
J12: library part CMP-1026-00012-1, "PC/104(TM) Elevated Socket Strip, Through-hole, Vertical, -55 to 125 degC, 2.54 mm Pitch, 5-Pin, Female, RoHS", Manufacturer=Samtec, PartNumber=ESQ-105-12-L-S, Temperature Range="-55 to 125 degC", ComponentLink1Description="Manufacturer URL", ComponentLink1URL=http://www.samtec.com, ComponentLink2Description=Datasheet, ComponentLink2URL=http://www.samtec.com/documents/webfiles/pdf/ESQ_TH.PDF, ComponentLink3Description="Package Specification", ComponentLink3URL=http://www.samtec.com/documents/webfiles/cpdf/ESQ-1XX-XX-X-X-XXX-XX-X-XX-MKT.pdf, DatasheetVersion=F-214, Mounting Technology=Through-hole, Orientation=Vertical, PackageDescription="ESQ Strip ASM", PackageReference=ESQ-105-12-X-S, PackageVersion="BZ, 9/1998", Pitch="2.54 mm", RoHS=True
J17: library part CMP-02766-001396-1, "CONN RCPT 3POS 0.1 TIN PCB", Color=Black, Contact Resistance=10mR, Max Current Rating=7.6A, Max Operating Temperature=105°C, Max Voltage Rating (AC)=550V, Min Operating Temperature=-55°C, Connector Type=Receptacle, Contact Material=Bronze, Contact Plating=Tin, Contact Type="Female Socket", Gender=Female, Height=8.51mm, Housing Color=Black, Housing Material=Plastic, Lead Free="Lead Free", Length=8.13mm, Mount="Through Hole", Number Of Contacts=3, Number of Positions=3, Number Of Rows=1, Orientation=Straight, Packaging=Bulk, Pitch=2.54mm, Radiation Hardening=No, RoHS Compliant=Yes, Series=SSQ, Termination=Solder, Width=2.41mm
J18: library part CMP-1502-02533-3, "Terminal Block, Wtb, 3Way, 30-12Awg Rohs Compliant: Yes", Current Rating=24A, Max Operating Temperature=120°C, Min Operating Temperature=-30°C, Voltage Rating=300V, Contact Material="Nickel, Tin", Height=13.9mm, Number Of Contacts=3, Number Of Rows=1, RoHS=Compliant
J19: library part CMP-1502-01326-4, "Btb Conn, Rcpt, 7Pos, 1Row, 2.54Mm Rohs Compliant: Yes", Contact Resistance=20mΩ, Current Rating=3A, Operating Supply Voltage=250V, Gender=Female, Lead Pitch=2.54mm, Number of Pins=7, Orientation=Vertical, RoHS=Non-Compliant
J21: library part CMP-0256-00001-1, "3 Conductor Power Jack, 2 break 2 aux contacts", ComponentLink1Description="Manufacturer URL", ComponentLink1URL=http://kycon.com/, ComponentLink2Description=Datasheet, ComponentLink2URL=http://anacapa.kycon.com/Catalog_PDF/KLDX_0202.pdf, Contact Finish=Brass, Mounting Technology="Through Hole", PackageDescription="Jack, 9 x 14.5 mm Body, 2.5 mm Center Pin Diameter", PackageReference=KLDX-0202-B, PartNumber=KLDX-0202-B
K1: library part CMP-08822-000286-1, "RELAY GEN PURPOSE SPDT 16A 5V", Coil Current=79.4mA, Coil Power=400mW, Coil Resistance=63R, Coil Voltage (DC)=5V, Contact Current Rating=16A, Max Operating Temperature=85°C, Max Voltage Rating (AC)=250V, Min Operating Temperature=-25°C, Package Quantity=100, Coil Type=Non-Latching, Contact Material=Tin, Depth=16.5mm, Height=19mm, Lead Free="Lead Free", Length=22.5mm, Life (Hours)=1000000Hour, Max Current Rating=16A, Mount=PCB, Number of Pins=5, Operate Time=10ms, Packaging=Rail/Tube, Power Consumption=400mW, Radiation Hardening=No, Relay Type="General Purpose", Release Time=5ms, RoHS Compliant=Yes, Series=G5LE, Termination=Solder, Throw Configuration=SPDT, Weight=12g, Width=16.5mm
LS1: library part CMP-231722-000001-1, "BUZZER MAGNETIC 5V 12MM TH", Frequency=2.4kHz, Max Operating Temperature=70°C, Max Supply Current=40mA, Min Operating Temperature=-30°C, Voltage Rating=5V, Contact Plating=Tin, Diameter=12mm, Height=9mm, Mount="Through Hole", Operating Supply Current=40mA, Packaging=Tray, Sensing Method=Magnetic, Series=AT, Termination="PC Pins"
Q1: library part CMP-07173-000101-1, "MOSFET N-CH 50V 220MA SOT-23", Case/Package=SOT-23, Continuous Drain Current (ID)=220mA, Drain to Source Breakdown Voltage=50V, Drain to Source Resistance=3.5R, Gate to Source Voltage (Vgs)=20V, Input Capacitance=27pF, Max Operating Temperature=150°C, Max Power Dissipation=360mW, Min Operating Temperature=-55°C, On-State Resistance=6R, Package Quantity=1, Threshold Voltage=1.3V, Contact Plating=Tin, Current Rating=220mA, Drain to Source Voltage (Vdss)=50V, Dual Supply Voltage=50V, Element Configuration=Single, Fall Time=9ns, Height=0.93mm, Lead Free="Lead Free", Length=2.92mm, Mount="Surface Mount", Nominal Vgs=1.3V, Number of Elements=1, Number of Pins=3, Packaging="Tape and Reel", Power Dissipation=360mW, Radiation Hardening=No, Rds On Max=3.5R, REACH SVHC="No SVHC", Rise Time=9ns, Termination=SMD/SMT, Turn-Off Delay Time=20ns, Turn-On Delay Time=2.5ns, Voltage Rating (DC)=50V, Weight=0.03g, Width=1.3mm
Q2 Q3: library part CMP-2000-05934-1, "NPN Small Signal Transistor, 45 V, 500 mA, -65 to 150 degC, 3-Pin SOT323, RoHS, Tape and Reel", Collector- Base Voltage VCBO=50V, Collector- Emitter Voltage VCEO Max=45V, Collector-Emitter Saturation Voltage=0.7V, Emitter- Base Voltage VEBO=5V, Manufacturer=DiodesIncorporated, Maximum DC Collector Current=1A, Maximum Operating Temperature=+150C, Minimum Operating Temperature=-65C, Package / Case=SOT-23, Package Description="3-Pin Small Outline Transistor, Body 2 x 1.25 mm, Pitch 0.65 mm", Package Reference=SOT323, Pd - Power Dissipation=200mW, Brand=DiodesIncorporated, Configuration=Single, Datasheet URL=http://www.diodes.com/_files/datasheets/ds30575.pdf, Datasheet Version="Rev. 5-2, 01/2014", DC Collector/Base Gain hfe Min=250, Factory Pack Quantity=3000, Gain Bandwidth Product fT=100MHz, Height=1mm, Length=2.2mm, Manufacturer URL=http://www.diodes.com/, Mounting Style=SMD/SMT, Mounting Technology=SurfaceMount, Packaging=Reel, Product Category=BipolarTransistors-BJT, RoHS=True, Series=BC817, Transistor Polarity=NPN, Unit Weight=0.000282oz, Width=1.35mm
Q4: library part CMP-83955-000007-1, "MOSFET N-CH 40V 50A TO252", Case/Package=DPAK, Continuous Drain Current (ID)=50A, Drain to Source Voltage (Vdss)=40V, Gate to Source Voltage (Vgs)=20V, Input Capacitance=1.8nF, Max Operating Temperature=175°C, Max Power Dissipation=2.3W, Min Operating Temperature=-55°C, Power Dissipation=50W, Mount="Surface Mount", Number of Elements=1, Number of Pins=3, Packaging="Cut Tape", Radiation Hardening=No, Rds On Max=7mR
R1 R2 R3 R4 R5 R6 R10 R12 R13 R14 R15 R16 R17 R18 R19 R20 R21 R22 R23: library part CMP-04015-052084-1, "RES 10K OHM 0.1% 1/8W 0805"
R7 R8 R9 R24: library part CMP-2001-04494-2, "RES SMD 2.2K OHM 1% 1/8W 0805", Manufacturer=Yageo, Manufacturer Part Number=AC0805FR-072K2L, Package=AC0805, Power Rating=1/8W, Resistance=2.2KΩ, Temperature="-55°C to +155°C", Temperature Range High=+155°C, Temperature Range Low=-55°C, Tolerance=0.01, Voltage Rating=150V, Automotive=Yes, Automotive Grade="Grade 0", Category=Res, ComponentLink2Description=Datasheet, ComponentLink2URL=http://www.yageo.com/documents/recent/PYu-AC_51_RoHS_L_6.pdf, Composition="Thick Film", Device Class L1="Passive Components", Device Class L2=Resistors, Device Class L3="Chip SMD Resistors", Digikey Description="RES SMD 2.2K OHM 1% 1/8W 0805", Footprint Url=http://www.yageo.com/exep/pages/download/literatures/PYu-R_Mount_10.pdf, Height=0.6mm, Ipc Land Pattern Name=RESC200125X50, Lead Free=Yes, Mouser Description="Thick Film Resistors - SMD 1/8W 2.2K ohm 1% AEC-Q200", Octopart=https://octopart.com/ac0805fr-072k2l-yageo-26041153, RoHS=TRUE, Series=AC
R11: library part CMP-02417-76381460-1, "COM-09806 Res Cermet Trimmer 10K Ohm 10% 0.5W(1/2W) 1(Elec)/1(Mech)Turns 3.15mm (9.53 X 9.53 X 4.83mm) Pin Thru-Hole", Max Operating Temperature=125°C, Min Operating Temperature=-55°C, Power Rating=500mW, Resistance=10kΩ, Temperature Coefficient=100ppm/°C, Tolerance=10%, Composition=Cermet, Height=10.92mm, NexarPartId=76381460
R25 R26 R27 R28 R29 R30: library part CMP-00683-81738753-1, "TLRZ1ETTB Res Metal Plate 0402 0 Ohm Sulfur Resistant Pad SMD T/R", Case/Package=0402, Max Operating Temperature=170°C, Min Operating Temperature=-65°C, Resistance=0Ω, Composition="Metal Element", Height=405µm, Lifecycle Status=Production, NexarPartId=81738753
SW1 SW2 SW3: library part CMP-03407-000002-1, "SWITCH TACTILE SPST-NO 0.05A 24V", Contact Current Rating=50mA, Contact Resistance=100mΩ, Manufacturer="TE Connectivity", Operating Force=160gf, Temperature="-35°C to +85°C", Temperature Range High=+85°C, Temperature Range Low=-35°C, Voltage Rating Dc=24V, Automotive=No, Category=Switch, ComponentLink2Description=Datasheet, ComponentLink2URL=https://www.te.com/commerce/DocumentDelivery/DDEController?Action=showdoc&DocId=Customer+Drawing%7F1825910%7FC10%7Fpdf%7FEnglish%7FENG_CD_1825910_C10.pdf%7F1-1825910-4, Device Class L1=Electromechanical, Device Class L2=Switches, Device Class L3="Tactile Switches", Digikey Description="SWITCH TACTILE SPST-NO 0.05A 24V", Electromechanical Life=100000Cycles, Height=9.8mm, Lead Free=Yes, Manufacturer Part Number=1-1825910-4, Mount="Through Hole", Mouser Description="Tactile Switches 6MM ACTHIGH TEMP TACT SWITCH", Octopart=https://octopart.com/1-1825910-4-te+connectivity-42270468, Package=1-1825910-4, RoHS=TRUE, Throw Configuration=SPST-NO
TP1 TP2 TP3 TP4 TP5 TP6 TP7 TP8 TP9 TP10 TP11 TP12: library part CMP-2000-05575-2, "PC TEST POINT MINIATURE YELLOW", Manufacturer=Keystone, Manufacturer Part Number=5004, Automotive=No, Category=Conn, ComponentLink2Description=Datasheet, ComponentLink2URL=https://www.keyelco.com/product-pdf.cfm?p=1313, Contact Material=Silver, Device Class L1=Connectors, Device Class L2=unset, Device Class L3=unset, Digikey Description="PC TEST POINT MINIATURE YELLOW", Height=4.72mm, Is Female=yes, Lead Free=Yes, Mouser Description="TEST POINT PC MINI .040\"D YELLOW", Number Of Contacts=1, Octopart=https://octopart.com/5004-keystone-28591, Package=5004, RoHS=TRUE
U1: library part CMP-0058-00811-3, "Low-Power RS-485/RS-422 Multipoint Transceiver, 8-pin Narrow SOIC", Manufacturer="Texas Instruments", PackageTopMarking=NSZXTT*DS485*M, PowerWise=N, Code_IPC=SOIC127P600-8, Code_JEDEC=MS-012-AA, ComponentLink1Description="Datasheet URL", ComponentLink1URL=http://www.ti.com/general/docs/lit/getliterature.tsp?genericPartNumber=DS485&fileType=pdf, CompType="Interface IC", PackageDescription="SOIC Narrow, 4.9 x 3.9 x 1.45mm, 8 Lead, 1.27mm Pitch", PackageReference=D0008A, PinCount=8, RoHS=N
U2: library part CMP-0186-00133-3, "IC CAN CONTROLLER W/SPI 18SOIC", Ambient Temperature Range High=+125°C, Ambient Temperature Range Low=-65°C, Manufacturer=Microchip, Max Supply Voltage=5.5V, Min Supply Voltage=2.7V, Nominal Supply Current=10mA, Package=C04-051, Temperature="-40°C to +85°C", Temperature Range High=+85°C, Temperature Range Low=-40°C, Automotive=No, Category=IC, ComponentLink2Description=Datasheet, ComponentLink2URL=http://ww1.microchip.com/downloads/en/DeviceDoc/MCP2515-Stand-Alone-CAN-Controller-with-SPI-20001801J.pdf, Device Class L1="Integrated Circuits (ICs)", Device Class L2="Interface ICs", Device Class L3=Controllers, Digikey Description="IC CAN CONTROLLER W/SPI 18SOIC", Footprint Url=http://ww1.microchip.com/downloads/en/DeviceDoc/18L_SOIC_Wide_7.50_SO_C04-0051D.pdf, Function=Controller, Height=2.65mm, Interface=SPI,CAN, Ipc Land Pattern Name=SOIC127P1030X265-18, Lead Free=Yes, Manufacturer Part Number=MCP2515-I/SO, Mouser Description="CAN Interface IC W/ SPI Interface", Octopart=https://octopart.com/mcp2515-i%2Fso-microchip-430187, RoHS=TRUE, Standoff Height=0.1mm
U3: library part CMP-2000-04923-2, "IC TRANSCEIVER HALF 1/1 8SO", Case/Package=SO, Max Operating Temperature=150°C, Max Supply Current=10mA, Max Supply Voltage=5.25V, Min Operating Temperature=-40°C, Min Supply Voltage=4.75V, Package Quantity=2500, Contact Plating=Gold, Data Rate=1Mbps, Interface=CAN, Lead Free="Lead Free", Mount="Surface Mount", Nominal Supply Current=10mA, Number of Pins=8, Number of Receive Buffers=1, Number of Transceivers=1, Number of Transmit Buffers=1, Packaging="Tape and Reel", Radiation Hardening=No, REACH SVHC="No SVHC", Receiver Hysteresis=70mV, Simplex/Duplex="Half Duplex"
U4: library part CMP-0066-00030-3, "Precision Centigrade Temperature Sensor, 3-pin TO-92, Pb-Free", Manufacturer="Texas Instruments", PackageTopMarking=NSXYTT*LM35*DZ, PowerWise=N, Code_JEDEC=TO-226-AA, ComponentLink1Description="Datasheet URL", ComponentLink1URL=http://www.ti.com/general/docs/lit/getliterature.tsp?genericPartNumber=LM35&fileType=pdf, CompType="Temp Sensor IC", PackageDescription="TO-92, Molded, 3 Lead", PackageReference=LP0003A, PinCount=3, RoHS=Y
U5: library part CMP-209535-000001-1, "LDO Voltage Regulators 1A, 3.3V", Dropout Voltage=1.1V, Manufacturer="Advanced Monolithic Systems", Max Junction Temp=+125°C, Max Power Dissipation=1.2W, Max Supply Voltage=15V, Nominal Supply Current=5mA, Output Current=1A, Output Voltage=3.3V, Package=AMS1117, Temperature="-40°C to +125°C", Temperature Range Low=-40°C, Automotive=No, Category=IC, ComponentLink2Description=Datasheet, ComponentLink2URL=http://www.advanced-monolithic.com/pdf/ds1117.pdf, Device Class L1="Integrated Circuits (ICs)", Device Class L2="Power Management ICs", Device Class L3="Voltage Regulators - Linear", Height=1.8mm, Ipc Land Pattern Name=SOT229P700X180-4, Lead Free=Yes, Manufacturer Part Number=AMS1117-3.3, Number of Outputs=1, Octopart=https://octopart.com/ams1117-3.3-advanced+monolithic+systems-25899300, Output Type=Fixed, RoHS=TRUE, Standoff Height=0.64mm, Temperature Range High=+125°C
U6: library part CMP-0254-00305-1, "64 x 8, Serial, I2C Real-Time Clock, 5.0V, 8-Pin SO, 0 to 70 degC, Pb-Free, Reel", Code_IPC=SOIC127P600-8, Code_JEDEC=MS-012-AA, ComponentLink1Description="Manufacturer URL", ComponentLink1URL=http://www.maxim-ic.com, ComponentLink2Description=Datasheet, ComponentLink2URL=http://datasheets.maxim-ic.com/en/ds/DS1307.pdf, ComponentLink3Description="Package Specification", ComponentLink3URL=http://pdfserv.maxim-ic.com/package_dwgs/21-0041.PDF, DatasheetVersion=10-Feb-2008, PackageDescription="8-Pin Small-Outline IC, Narrow (0.15in), 1.27 mm Pitch, SOIC (N), Pb-Free", PackageReference=S8+2, PackageVersion="revC, 2010"
U7: library part CMP-06313-000048-1, "IC EEPROM 32K I2C 1MHZ 8SOIC", Case/Package=SOIC, Frequency=1MHz, Max Operating Temperature=85°C, Min Operating Temperature=-40°C, Access Time=550ns, Memory Size=32Kb, Memory Type=Non-Volatile, Mount="Surface Mount", Number of Pins=8, Packaging="Tape and Reel"
Y1: library part CMP-1669-00002-3, ESR (Equivalent Series Resistance)=80Ω, Frequency=8MHz, Frequency Stability=50ppm, Frequency Tolerance=0.003%, Load Capacitance=20pF, Max Operating Temperature=70°C, Min Operating Temperature=-10°C, Height=3.5mm, Lead Free="Lead Free", Length=11.3538mm, Mount="Through Hole", NexarPartId=316504, Number of Pins=49, Packaging=Bulk, RoHS=Compliant, Schedule B="8541600025, 8541600025", Termination=Radial, Tolerance=0.003%, Width=4.65mm
Y2: library part CMP-2000-05723-1, "Crystal, 12.5 pF, 32.768 KHz, -10 to 60 degC, 2-Pin THD, RoHS, Bulk", Case Diameter=2.1mm, Case Length=6.2mm, Frequency=32.768kHz, Frequency Stability=-0.034PPM, Load Capacitance=12.5pF, Manufacturer=ABRACON, Operating Temperature Range=-10Cto+60C, Package / Case=Cylinder, Package Description="2-Pin Through Hole Device, Dia 2.1 mm, Body Length 6.2 mm", Package Reference=AB26T, Tolerance=20PPM, Brand=ABRACON, Datasheet URL=http://www.abracon.com/Resonators/AB26T.pdf, Datasheet Version=06/2010, Dimensions=2.1mmDia.x6.2mmL, Esr=35kOhms, Factory Pack Quantity=500, Lead Spacing=0.8mm, Manufacturer URL=http://www.abracon.com/, Mounting Style=ThroughHole, Mounting Technology=ThroughHole, Package URL=http://www.abracon.com/Support/PackageDrawing/Resonators/AB26T.PDF, Packaging=Bulk, Product Category=Crystals, RoHS=Details, Series=AB26T, Termination Style=Radial, Type=WatchCrystal

## Via types
v1: diameter 0.6, hole 0.3, Top Layer to Bottom Layer, tented both sides, 543 vias
v2: diameter 0.6, hole 0.3, Top Layer to Bottom Layer, 148 vias
v3: diameter 1.27, hole 0.711, Top Layer to Bottom Layer, 2 vias

## Nets (pads, with @x,y where several pads share a name; then routed paths per layer and width w, separated by ;. In a path a pad name is that pad's centre, name@x,y a point inside that pad or via, vN(x,y) a via of type N, cw(c..) or ccw(c..) an arc to the next point about the centre after c; other vN are vias at no path point)
+3.3V: C1.1 C2.1 J3.8 J5.3 J12.2 J22.1 Q1.1 R2.2 R3.2 R4.2 R7.2 R11.1 R13.2 R14.2 R15.2 R16.2 R17.2 TP11.1 U7.8 | length 265.5